# Altium PCB PCB.PcbDoc (part 2 of 2)
Units mil, origin at the board's own origin, x right, y up, seen from the top; angles counter-clockwise.
Board outline 2362.2 x 3307.09 mil, 4 copper layers (Top Layer, Gnd, Power, Bottom Layer), stack 23.756 mil thick; 68 components, 50 nets, 353 pads, 514 vias.
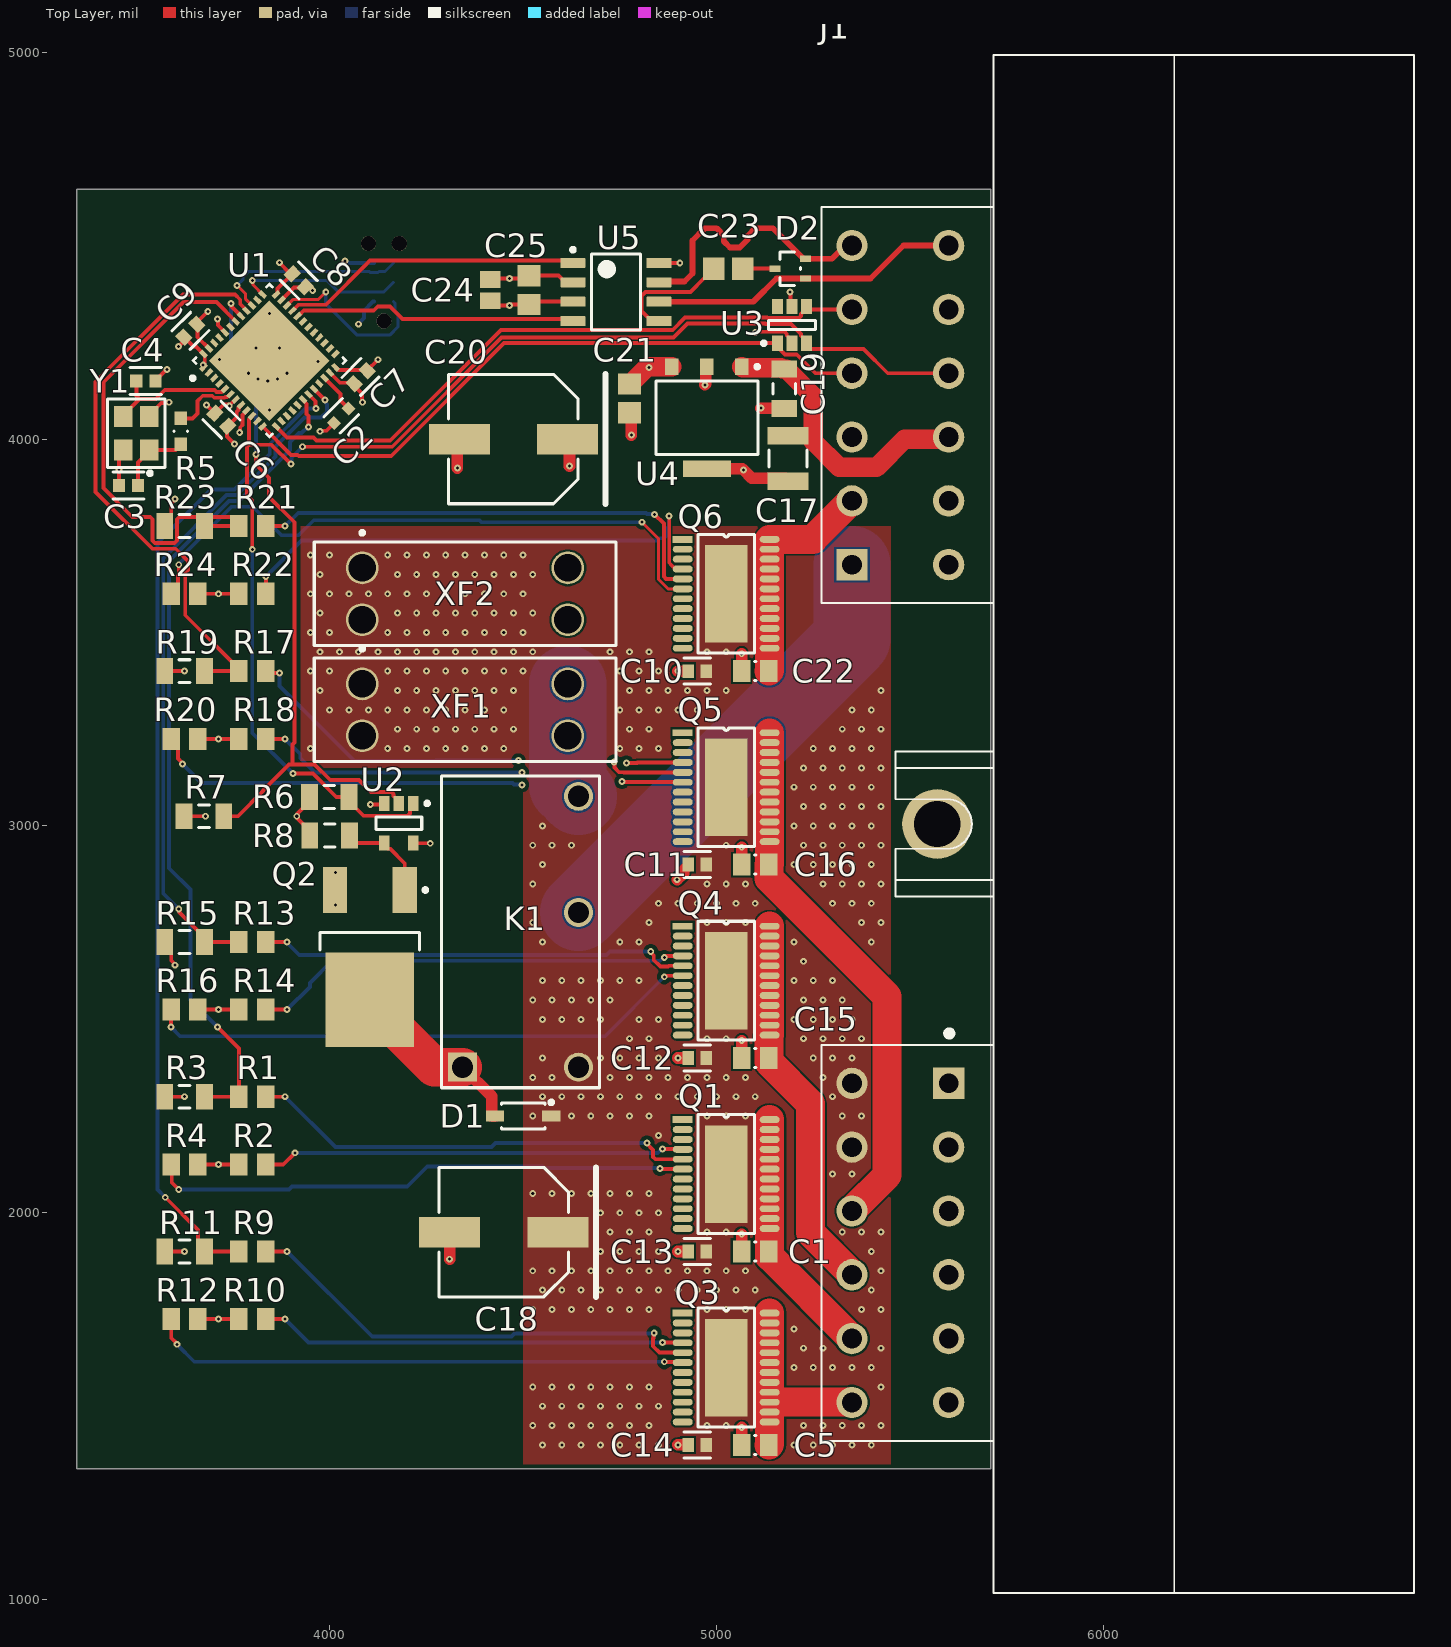
[diagram p0: Top Layer view]

## Via types
v1: diameter 17.72, hole 7.87, Top Layer to Bottom Layer, 514 vias

## Nets (pads, with @x,y where several pads share a name; then routed paths per layer and width w, separated by ;. In a path a pad name is that pad's centre, name@x,y a point inside that pad or via, vN(x,y) a via of type N, cw(c..) or ccw(c..) an arc to the next point about the centre after c; other vN are vias at no path point) (continued)
NetQ6_4: (continued)
  Bottom Layer w10: v1(3835,3645) 3927.28,3737.28 4846.66,3737.28 4852.9,3743.52 4864.14,3743.52 4875,3754.38 4875,3771.78 4876.83,3773.61 4876.83,3800.63 v1(4877.47,3801.27)
NetQ6_5: Q6.5 R21.2 | length 1242.9
  Top Layer w10: R21.2 v1(3885,3775) ; v1(4840,3805) 4863.81,3781.19 4863.81,3676.37 4864,3676.18 4864,3644.24 4869.86,3638.39 Q6.5
  Bottom Layer w10: v1(3885,3775) 3918.86,3808.86 4817.31,3808.86 4819.69,3806.48 4838.52,3806.48 v1(4840,3805)
NetQ6_6: Q6.6 R24.2 | length 1638.5
  Top Layer w8: v1(4807.43,3785) 4849.81,3742.62 4849.81,3670.57 4850,3670.38 4850,3637.29 4874.49,3612.8 Q6.6
  Top Layer w10: R24.2 3608.19,3617.64 3608.19,3646.14 3610,3647.95 v1(3610,3675) ; Q6.6@4911.89,3612.09 Q6.6
  Bottom Layer w10: v1(3610,3675) 3610,3677.09 3623.51,3690.6 3623.51,3702.3 3746.21,3825 3801.26,3825 3875.12,3751.14 3919.93,3751.14 3958.79,3790 4387.49,3790 4392.49,3785 v1(4807.43,3785)
NetR5_1: R5.1 U1.6 | length 177.2
  Top Layer w10: R5.1 3645.75,4053.46 3658.14,4065.86 3658.14,4097.88 3672.12,4111.86 3696.65,4111.86 3701.74,4106.77 3728.52,4106.77 3730.69,4108.94 3735.31,4108.94 3742.13,4115.76 U1.6
SWCLK: J2.4 U1.37 | length 435.2
  Top Layer w8: v1(3800,4410) 3801.86,4408.14 3801.86,4398.34 U1.37
  Bottom Layer w8: v1(3800,4410) 3992.33,4410 4021.82,4380.51 4140.51,4380.51 J2.4
SWDIO: J2.2 U1.34 | length 444.1
  Top Layer w8: U1.34 3890.71,4345.43 3906.28,4361 3971,4361 v1(3990,4380)
  Bottom Layer w8: v1(3990,4380) 3990,4349.43 4070.93,4268.5 4155.12,4268.5 4176.5,4289.88 4176.5,4320.12 4169.11,4327.51 4169.11,4350.89 J2.2
SWO: J2.6 U1.39 | length 501.4
  Top Layer w8: v1(3760.5,4397.05) 3782.86,4374.68 3782.86,4361.66 U1.39
  Bottom Layer w8: v1(3760.5,4397.05) 3776.44,4412.99 3776.44,4418.77 3790.53,4432.86 4102.5,4432.86 4104.85,4430.51 4125.15,4430.51 4127.5,4432.86 4142.86,4432.86 J2.6
UART_RX: J1.B5 U1.13 U3.4 | length 1656.6
  Top Layer w10: U1.13 3890.11,4003.86 3957.79,4003.86 3965.5,3996.14 4156.7,3996.14 4442.76,4282.2 4886.72,4282.2 4918.37,4313.86 5131.1,4313.86 5132.39,4312.56 5212.92,4312.56 5218.78,4318.42 5218.78,4322.72 5232.4,4336.34 U3.4 5235.35,4339.29 5239.61,4335.04 J1.B5
UART_TX: J1.B4 U1.12 U3.1 | length 1713.5
  Top Layer w10: U1.12 3900.32,3958.86 3917.4,3958.86 3920.12,3956.14 4159.13,3956.14 4450.74,4247.76 U3.1 5166.38,4238.98 5166.38,4228.77 5177.08,4218.07 5207.37,4218.07 5255.36,4170.08 J1.B4
Upshift: C5.2 J1.A7 Q3.13 Q3.14 Q3.15 Q3.16 Q3.17 Q3.18 Q3.19 Q3.20 Q3.21 Q3.22 Q3.23 Q3.24 | length 554.4
  Top Layer w75: C5.2 5137.4,1401.97 Q3.13 Q3.14 Q3.15 ; Q3.24 Q3.23 Q3.22 Q3.21 Q3.20 Q3.19 Q3.18 Q3.17 Q3.16 Q3.15 ; J1.A7 5349.41,1510.43 Q3.15
UpshiftDrive: R9.1 R11.1 U1.19 | length 2583.9
  Top Layer w10: v1(3575,2040) 3659.53,1955.47 3659.53,1916.65 R11.1 R9.1 ; U1.19 3963.51,4097.5 3963.51,4080.16 v1(3964.48,4079.19)
  Bottom Layer w10: v1(3575,2040) 3555,2060 3555,3731.67 3693.33,3870 3753.74,3870 3845.01,3961.27 3845.01,3986.44 3937.76,4079.19 v1(3964.48,4079.19)
WaterPumpDrive: R13.1 R15.1 U1.20 | length 1792.9
  Top Layer w10: v1(3610,2785) 3611.48,2783.52 3611.48,2776.52 3676.18,2711.81 R15.1 R13.1 ; U1.20 3987.59,4101.26 v1(3988.31,4101.26)
  Bottom Layer w10: v1(3610,2785) 3570,2825 3570,3691.21 3733.79,3855 3759.95,3855 3860.01,3955.06 3860.01,3980.23 3935.12,4055.33 3977.93,4055.33 3992.72,4070.12 3992.72,4089.88 3989.79,4092.81 3989.79,4099.78 v1(3988.31,4101.26)
WaterPumpOut: C15.2 J1.A9 Q4.13 Q4.14 Q4.15 Q4.16 Q4.17 Q4.18 Q4.19 Q4.20 Q4.21 Q4.22 Q4.23 Q4.24 | length 990.7
  Top Layer w75: Q4.24 Q4.23 Q4.22 Q4.21 Q4.20 Q4.19 Q4.18 Q4.17 Q4.16 Q4.15 Q4.14 Q4.13 5135.43,2457.28 5135.43,2389.57 5242.8,2282.2 5242.8,1948.58 5350,1841.37 J1.A9
pads on no net: J2. J2.3 Q1.1 Q1.2 Q1.3 Q1.7 Q1.8 Q1.9 Q1.10 Q1.11 Q1.12 Q3.1 Q3.2 Q3.3 Q3.7 Q3.8 Q3.9 Q3.10 Q3.11 Q3.12 Q4.1 Q4.2 Q4.3 Q4.7 Q4.8 Q4.9 Q4.10 Q4.11 Q4.12 Q5.1 Q5.2 Q5.3 Q5.7 Q5.8 Q5.9 Q5.10 Q5.11 Q5.12 Q6.1 Q6.2 Q6.3 Q6.7 Q6.8 Q6.9 Q6.10 Q6.11 Q6.12 U1.2 U1.3 U1.4 U1.11 U1.14 U1.15 U1.16 U1.17 U1.21 U1.25 U1.26 U1.27 U1.28 U1.29 U1.30 U1.31 U1.38 U1.43 U1.45 U1.46 U3.6

## Polygon pours and split planes (outlines as drawn)
3V3 on Power "NONET_L-01_P-001" (solid, pour order 3): 5450,3800 3900,3800 3900,3125 4225,3125 4450,2900 4450,1350 3346.46,1350 3346.46,4645.67 5450,4645.67
+12 on Power "Power-+12" (solid, pour order 7): 3925,3150 4250,3150 4500,2900 4500,1350 5675,1350 5675,4075 5475,4075 5475,3775 3925,3775
ECUPowerOut on Bottom Layer "NONET_L-01_P-001" (solid, pour order 5): 4550,3475 4550,3725 4975,3725 5225,3975 5475,3975 5675,3775 5675,3625 5650,3600 5300,3600 5175,3475
+12 on Top Layer "NONET_L-01_P-001" (solid, pour order 4): 5450,3775 3925,3775 3925,3150 4500,3150 4500,1350 5450,1350
GND on Gnd "NONET_L-01_P-001" (solid, pour order 0): 3346.46,4645.67 5708.66,4645.67 5708.66,1338.58 3346.46,1338.58

## Silkscreen, mask and mechanical layers (free items; w line width, h text height)
Bottom Overlay:
  drawing of 4 lines, arcs and shapes, not listed
  text "ECU Fuse /  /  /  / ETC Fuse" at 5118.11,3267.72 h100
  text "Bronco Racing / BCM Rev 1 / Noah Gould & Jack LeFevre 2022" at 3582.68,787.4 h180 r270

## Dimensions
3346.46,4645.67 to 3346.46,1338.58 on Top Assembly
3346.46,1338.58 to 5708.66,1338.58 on Top Assembly